# Altium PCB Main.PcbDoc
Units mil, origin at the board's own origin, x right, y up, seen from the top; angles counter-clockwise.
Board outline 1346 x 884 mil, 4 copper layers (Top Layer, Layer 1, Layer 2, Bottom Layer), stack 23.756 mil thick; 104 components, 70 nets, 324 pads, 137 vias.
Unrouted connection lines stored in the file: 54.
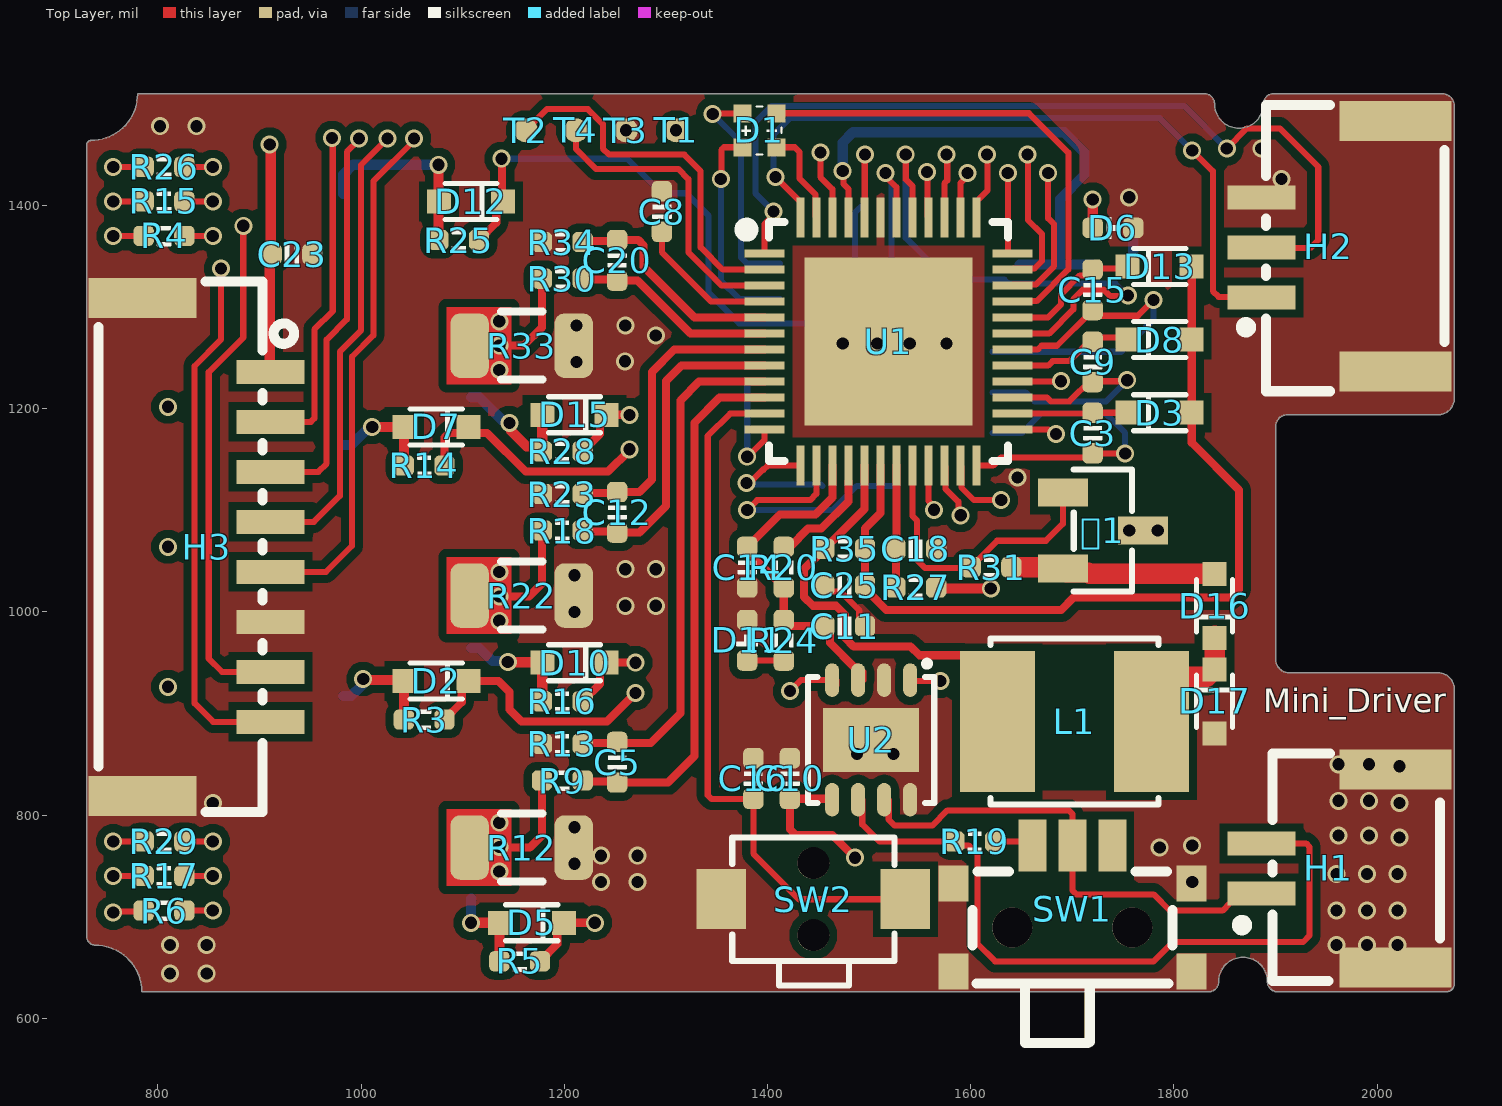
[diagram p0: Top Layer view]
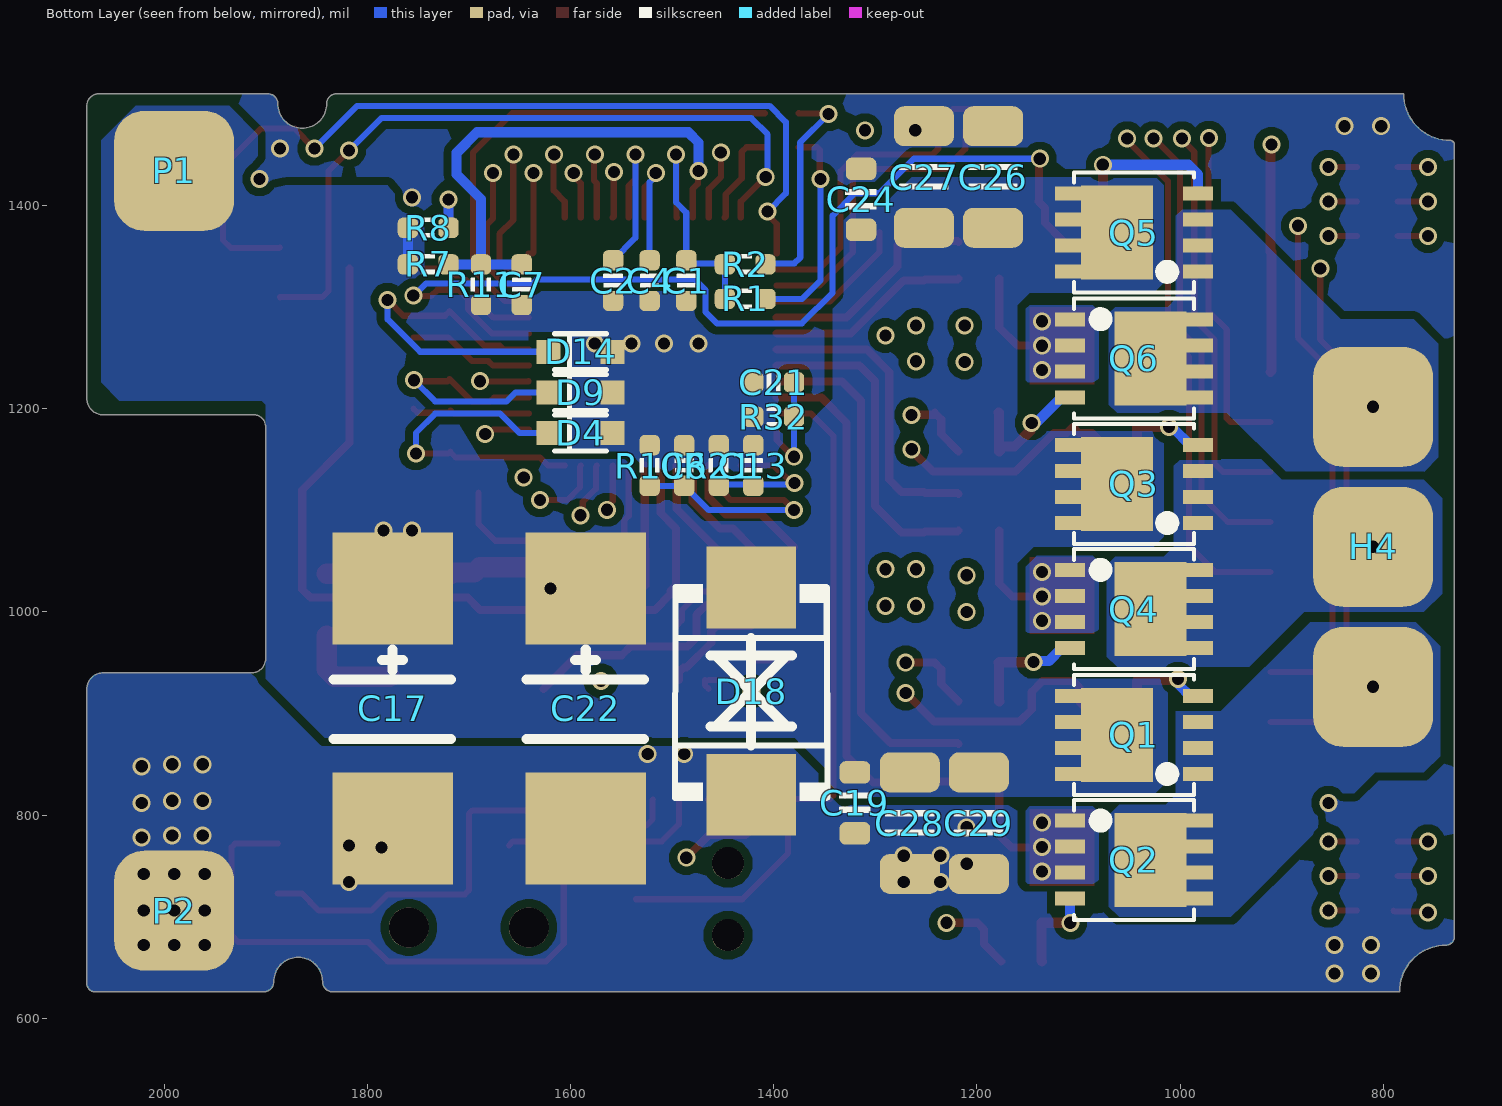
[diagram p1: Bottom Layer view, seen from below]
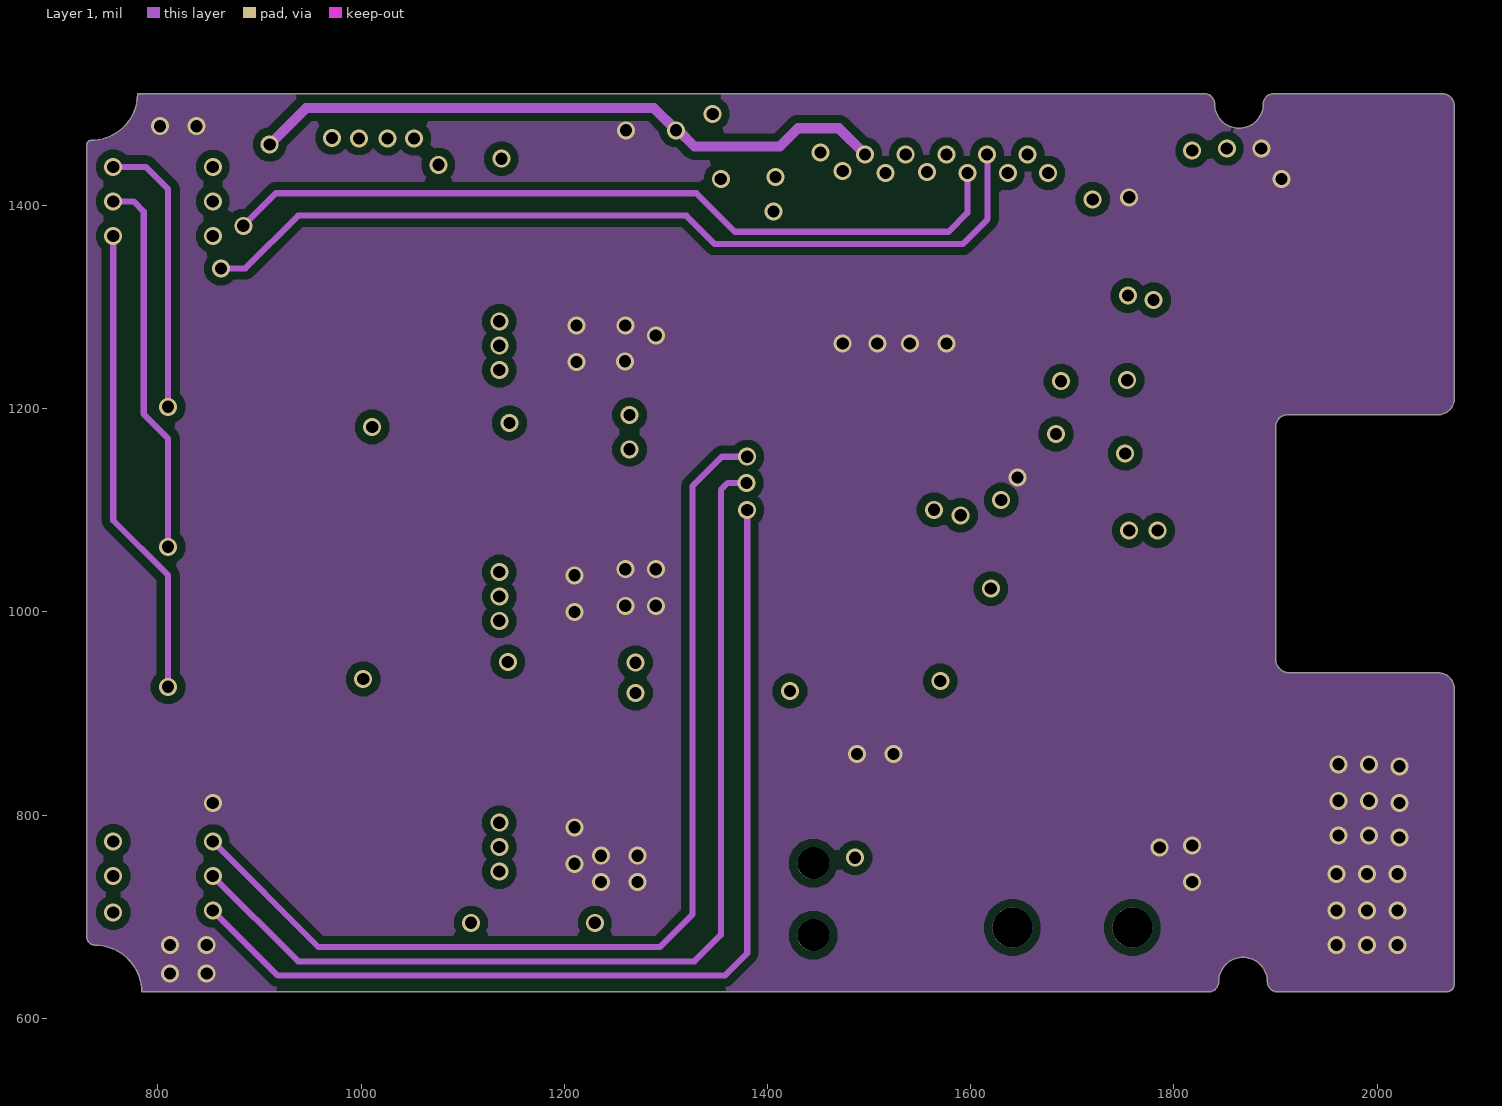
[diagram p2: Layer 1]
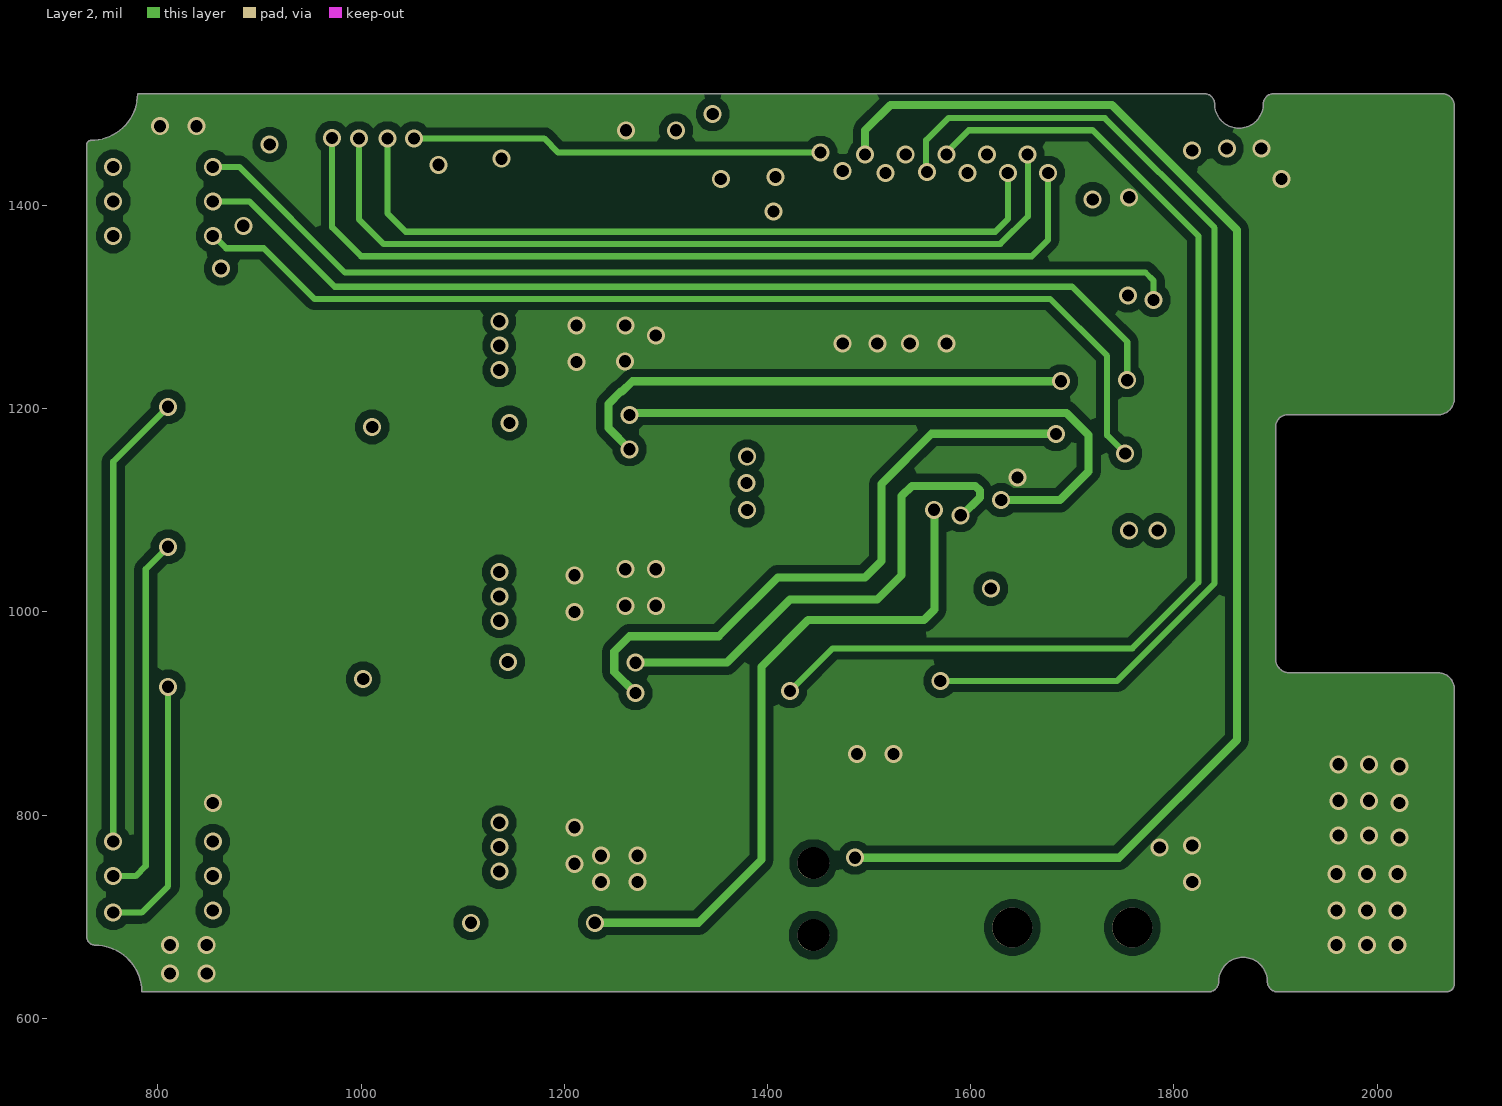
[diagram p3: Layer 2]
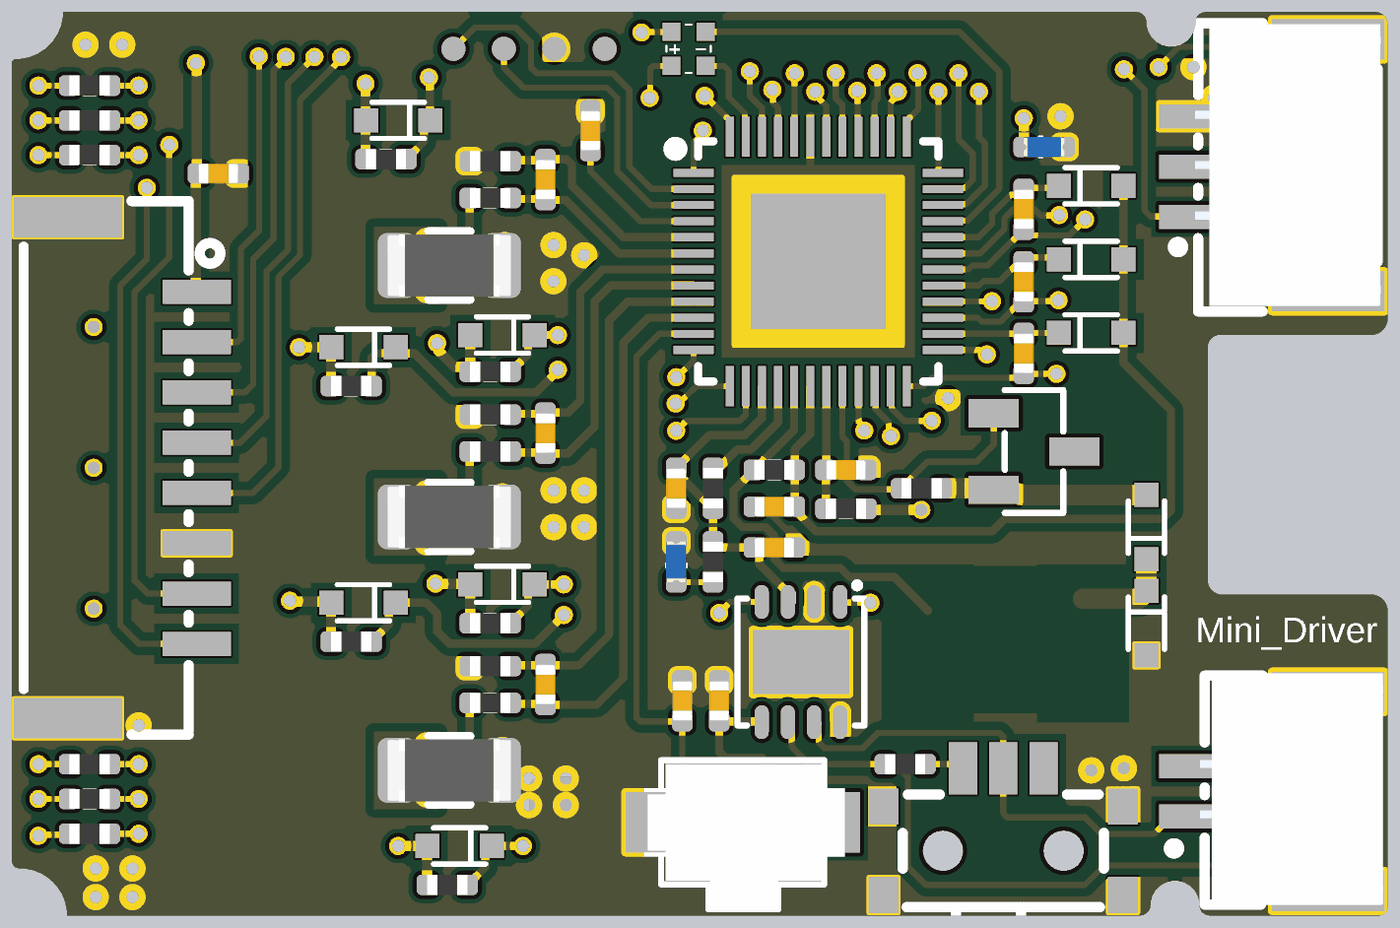
[diagram p4: 3D render of the assembled board from above, using the file's embedded part models]
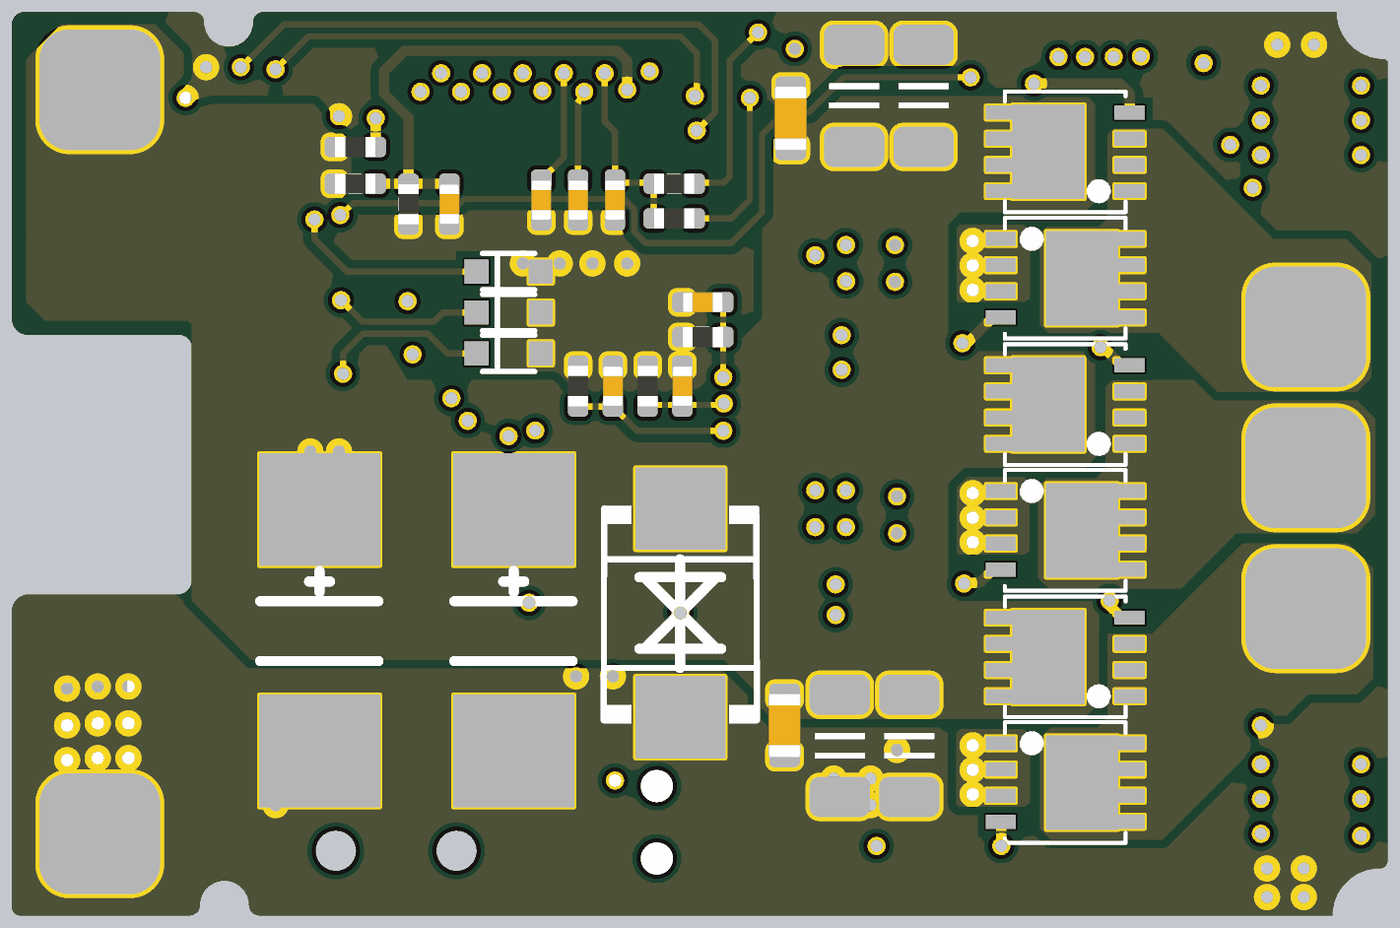
[diagram p5: 3D render of the assembled board from below, using the file's embedded part models]

## Layer stack, top to bottom
Top Solder: solder mask 0.4, Solder Resist, Dk 3.5
Top Layer: signal copper 1.4
Dielectric 2: prepreg 2.8, PP-006, Dk 4.1
Layer 1: signal copper 1.378
Dielectric 1: dielectric 12.6, FR-4, Dk 4.8
Layer 2: signal copper 1.378
Dielectric 3: prepreg 2.8, PP-006, Dk 4.1
Bottom Layer: signal copper 1.4
Bottom Solder: solder mask 0.4, Solder Resist, Dk 3.5

## Board outline
738,672 cw(c738,626) 784,626 1834,626 ccw(c1834,636) 1844,636 cw(c1868,636) 1868,660 cw(c1868,636) 1892,636 ccw(c1902,636) 1902,626 2068,626 ccw(c2068,634) 2076,634 2076,924 ccw(c2060,924) 2060,940 1914,940 cw(c1914,954) 1900,954 1900,1182 cw(c1912,1182) 1912,1194 2060,1194 ccw(c2060,1210) 2076,1210 2076,1498 ccw(c2064,1498) 2064,1510 1898,1510 ccw(c1898,1500) 1888,1500 cw(c1864,1500) 1864,1476 cw(c1864,1500) 1840,1500 ccw(c1830,1500) 1830,1510 780,1510 cw(c734,1510) 734,1464 ccw(c734,1460) 730,1460 730,680 ccw(c738,680)

## Design rules (kind name [scope] priority, off if disabled: settings)
Clearance [All] p1: gap=8 ignorepadtopadclearanceinfootprint=FALSE except(0: Arc-Hole Track-Hole SMDPad-Hole THPad-Hole Via-Hole Fill-Hole Poly-Hole Region-Hole Text-Hole; 6: Arc-Arc Arc-Track Arc-SMDPad Track-Track Track-SMDPad SMDPad-SMDPad)
ComponentClearance [All] p1: gap=0 collisioncheckmode=3 verticalgap=0 showdistances=FALSE
HoleSize [All] p1: absolutevalues=TRUE maxlimit=99999 minlimit=1 maxpercent=80.000 minpercent=20.000
MinimumSolderMaskSliver [All] p1: minsoldermaskwidth=0
PolygonConnect [All] p1: connectstyle=Direct reliefconductorwidth=10 reliefentries=4 polygonreliefangle="90 Angle" airgapwidth=10
RoutingVias [All] p1: holewidth=12 width=17.72 viastyle="Through Hole" minholewidth=6 minwidth=10 maxholewidth=15 maxwidth=28
SilkToSilkClearance [All] p1: silktosilkclearance=0
SilkToSolderMaskClearance [IsPad] p1: minsilkscreentomaskgap=0 clearancetoexposedcopper=TRUE
SolderMaskExpansion [All] p1: expansion=4 istentingtop=FALSE
Width [All] p1: maxlimit=40 minlimit=6 preferedwidth=15 minimp=50.000000 maximp=50.000000 favimp=50.000000
25 further rules are at their usual default settings.

## Components (designator, comment, footprint, x,y, rotation, side; value= is the part's Value field where it differs from the comment)
1 "CJ2310" SOT-23-3_L2.9-W1.3-P1.90-LS2.4-BR 1730,1080 r180 top (schematic designator 1)
C1 "4.7uF" CAP_0402 1486,1326 r270 bottom value=0.1u
C2 "2.2uF" CAP_0402 1558,1326 r270 bottom value=0.1u
C3 "1uF" CAP_0402 1720,1176 r90 top value=0.1u
C4 "2.2uF" CAP_0402 1522,1326 r270 bottom value=0.1u
C5 "3.3nF" CAP_0402 1252,852 r270 top value=0.1u
C6 "100nF" CAP_0402 1488,1144 r270 bottom value=0.1u
C7 "10nF" CAP_0402 1648,1322 r270 bottom value=0.1u
C8 "2.2uF" CAP_0402 1296,1394 r270 top value=0.1u
C9 "1uF" CAP_0402 1720,1246 r90 top value=0.1u
C10 "100nF" CAP_0402 1422,836 r90 top value=0.1u
C11 "100nF" CAP_0402 1476,986 r180 top value=0.1u
C12 "3.3nF" CAP_0402 1252,1098 r270 top value=0.1u
C13 "100nF" CAP_0402 1420,1144 r270 bottom value=0.1u
C14 "4.7uF" CAP_0402 1380,1044 r90 top value=0.1u
C15 "1uF" CAP_0402 1720,1317 r90 top value=0.1u
C16 "100nF" CAP_0402 1386,836 r90 top value=0.1u
C17 "10uF" CAP_7343 1775,905 r90 bottom
C18 "1uF" CAP_0402 1546,1062 r180 top value=0.1u
C19 "1uF" 0603-CAP 1320,812 r90 bottom value=0.1u
C20 "3.3nF" CAP_0402 1252,1346 r270 top value=0.1u
C21 "100nF" CAP_0402 1400,1226 r180 bottom value=0.1u
C22 "10uF" CAP_7343 1585,905 r90 bottom
C23 "100nF" CAP_0402 932,1352 r180 top value=0.1u
C24 "1uF" 0603-CAP 1314,1406 r270 bottom value=0.1u
C25 "10uF" CAP_0402 1476,1026 r0 top value=0.1u
C26 "电容-1206" 1206-CAP 1184,1428 r90 bottom value=0.1u
C27 "电容-1206" 1206-CAP 1252,1428 r90 bottom value=0.1u
C28 "电容-1206" 1206-CAP 1266,792 r270 bottom value=0.1u
C29 "电容-1206" 1206-CAP 1198,792 r270 bottom value=0.1u
D1 "LED_0404" LED-SMD_4P-L1.0-W1.0-TL-1 1392,1474 r180 top
D2 "1N5819W" SOD-523_L1.2-W0.8-LS1.6-FD 1074,932 r0 top
D3 "1N5819W" SOD-523_L1.2-W0.8-LS1.6-FD 1786,1196 r180 top
D4 "1N5819W" SOD-523_L1.2-W0.8-LS1.6-FD 1590,1176 r0 bottom
D5 "1N5819W" SOD-523_L1.2-W0.8-LS1.6-FD 1168,694 r0 top
D6 "LED_0402" LED_0402 1740,1378 r0 top value=color?
D7 "1N5819W" SOD-523_L1.2-W0.8-LS1.6-FD 1074,1182 r0 top
D8 "1N5819W" SOD-523_L1.2-W0.8-LS1.6-FD 1786,1268 r180 top
D9 "1N5819W" SOD-523_L1.2-W0.8-LS1.6-FD 1590,1216 r0 bottom
D10 "1N5819W" SOD-523_L1.2-W0.8-LS1.6-FD 1210,950 r0 top
D11 "LED_0402" LED_0402 1380,972 r90 top value=color?
D12 "1N5819W" SOD-523_L1.2-W0.8-LS1.6-FD 1108,1404 r0 top
D13 "1N5819W" SOD-523_L1.2-W0.8-LS1.6-FD 1786,1340 r180 top
D14 "1N5819W" SOD-523_L1.2-W0.8-LS1.6-FD 1590,1256 r0 bottom
D15 "1N5819W" SOD-523_L1.2-W0.8-LS1.6-FD 1210,1194 r0 top
D16 "1N5819W" SOD-523_L1.2-W0.8-LS1.6-FD 1840,1006 r270 top
D17 "1N5819W" SOD-523_L1.2-W0.8-LS1.6-FD 1840,912 r90 top
D18 "TVS-SMB" SMB_L4.3-W3.6-LS5.4-BI 1422,922 r270 bottom
H1 "GH1.25-2PW" CONN-TH_2P-P1.25_XUNPU_WAFER-GH1.25-2PLB 1952,747.44 r90 top
H2 "GH1.25-3PW" CONN-SMD_GH1.25-3P 1952,1360 r90 top
H3 "GH1.25-8PWBPZ" CONN-SMD_8P-P1.25_GH1.25-8PWBPZ 838,1064 r270 top
H4 "MR30_SMD" MR30_SMD 810,1064 r90 bottom
L1 "100uH" IND-SMD_L4.0-W4.0_SMNR4020 -14225.88,18784 r0 top
P1 "PAD" Pad 1990,1434 r180 bottom
P2 "PAD" Pad 1990,706 r180 bottom
Q1 "WSD6036DN" DFN3X3-8L__L3.0-W3.0-P0.65-LS3.2-BL 1034.6,878.95 r0 bottom
Q2 "WSD6036DN" DFN3X3-8L__L3.0-W3.0-P0.65-LS3.2-BL 1056.25,756.05 r180 bottom
Q3 "WSD6036DN" DFN3X3-8L__L3.0-W3.0-P0.65-LS3.2-BL 1034.6,1125.95 r0 bottom
Q4 "WSD6036DN" DFN3X3-8L__L3.0-W3.0-P0.65-LS3.2-BL 1056.25,1002.8 r180 bottom
Q5 "WSD6036DN" DFN3X3-8L__L3.0-W3.0-P0.65-LS3.2-BL 1034.6,1373.2 r0 bottom
Q6 "WSD6036DN" DFN3X3-8L__L3.0-W3.0-P0.65-LS3.2-BL 1056.25,1249.6 r180 bottom
R1 "1K" RES_0402 1428,1308 r180 bottom value=22R
R2 "1K" RES_0402 1428,1342 r180 bottom value=22R
R3 "10R" RES_0402 1062,894 r0 top value=22R
R4 "10R" RES_0402 806,1370 r0 top value=22R
R5 "10R" RES_0402 1156,656 r0 top value=22R
R6 "100K" RES_0402 806,706 r0 top value=22R
R7 "100K" RES_0402 1740,1342 r180 bottom value=22R
R8 "10K" RES_0402 1740,1378 r180 bottom value=22R
R9 "100R" RES_0402 1198,834 r0 top value=22R
R10 "4.3K" RES_0402 1522,1144 r90 bottom value=22R
R11 "4.3K" RES_0402 1688,1322 r270 bottom value=22R
R12 "2mR" 1206-RES 1158,768 r180 top value=22R
R13 "100R" RES_0402 1198,870 r0 top value=22R
R14 "10R" RES_0402 1062,1144 r0 top value=22R
R15 "10R" RES_0402 806,1404 r0 top value=22R
R16 "10R" RES_0402 1198,912 r0 top value=22R
R17 "100K" RES_0402 806,740 r0 top value=22R
R18 "100R" RES_0402 1198,1080 r0 top value=22R
R19 "120R" RES_0402 1604,774 r180 top value=22R
R20 "33R" RES_0402 1416,1044 r270 top value=22R
R21 "4.3K" RES_0402 1454,1144 r90 bottom value=22R
R22 "2mR" 1206-RES 1158,1016 r180 top value=22R
R23 "100R" RES_0402 1198,1116 r0 top value=22R
R24 "2K" RES_0402 1416,972 r270 top value=22R
R25 "10R" RES_0402 1096,1366 r0 top value=22R
R26 "10R" RES_0402 806,1438 r0 top value=22R
R27 "0R" RES_0402 1546,1024 r0 top value=22R
R28 "10R" RES_0402 1198,1158 r0 top value=22R
R29 "100K" RES_0402 806,774 r0 top value=22R
R30 "100R" RES_0402 1198,1328 r0 top value=22R
R31 "100R" RES_0402 1620,1044 r180 top value=22R
R32 "4.3K" RES_0402 1400,1192 r0 bottom value=22R
R33 "2mR" 1206-RES 1158,1262 r180 top value=22R
R34 "100R" RES_0402 1198,1364 r0 top value=22R
R35 "0.33R" RES_0402 1476,1062 r180 top value=22R
SW1 "TA-3514-A1-B" TA-3514-A1-B 1700,683.15 r0 top
SW2 "YD-3410" SW-SMD_L3.9-W2.9-LS4.8-EH-A 1445,705 r0 top
T1 "testpoint" testpoint 1310,1474 r0 top
T2 "testpoint" testpoint 1162,1474 r0 top
T3 "testpoint" testpoint 1260.67,1474 r0 top
T4 "testpoint" testpoint 1211.33,1474 r0 top
U1 "PAC5523AQM-T" QFN-48_L6.0-W6.0-P0.40-TL-EP4.2 1517,1266 r0 top
U2 "SIT1044TK/3" TDFN-8_L3.0-W3.0-P0.65-BL-EP 1502,874 r180 top

## Footprints (in the part's own frame and the unit in brackets; to place one, negate y for a bottom-side part, rotate by r counter-clockwise, add the part's x,y. Pads: shape width x height; smd on the part's side, far side on the other; paste and mask are expansions set on the pad)
0603-CAP [mil]
  rrect50% 22x30 smd: 1(-30,0) 2(30,0)
  silkscreen extent -10,-15 10,15, body extent -31,-16 31,16, height 31
1206-CAP [mm]
  rrect50% 1x1.5 smd: 1(-1.27,0) 2(1.27,0)
  silkscreen extent -0.3,-0.61 0.3,0.61, body extent -1.5,-0.75 1.5,0.75, height 1.5
1206-RES [mil]
  rrect50% 37.64x63.38 smd paste+0 mask+0: 1(-51.22,0) 2(51.22,0)
  silkscreen extent -21,-33 21,33, body extent -61,-31 61,31, height 26
CAP_0402 [mil]
  rrect50% 20x20 smd: 1(-20,0) 2(20,0)
  silkscreen extent -7,-9 7,9, body extent -20,-10 20,10, height 20
CAP_7343 [mil]
  rect 110.2x118.5 smd paste+0 mask+2: 1(118.11,0) 2(-118.11,0)
  silkscreen extent -30,-58 58,58
CONN-SMD_8P-P1.25_GH1.25-8PWBPZ [mm]
  rect 0.6x1.7 smd paste+0 mask+0.05: 1(-4.375,1.85) 2(-3.125,1.85) 3(-1.875,1.85) 4(-0.625,1.85) 5(0.625,1.85) 6(1.875,1.85) 7(3.125,1.85) 8(4.375,1.85)
  rect 1x2.7 smd paste+0 mask+0.05: 9(-6.225,-1.35) 10(6.225,-1.35)
  silkscreen extent -6.63,-2.45 6.63,2.44
CONN-SMD_GH1.25-3P [mm]
  rect 0.6x1.7 smd: 1(-1.282,1.675) 2(-0.032,1.675) 3(1.218,1.675)
  rect 1x2.8 smd: 4(-3.132,-1.675) 5(3.132,-1.675)
  silkscreen extent -3.63,-2.9 3.53,2.19, body extent -3.49,-2.98 3.51,1.63, height 4.03
CONN-TH_2P-P1.25_XUNPU_WAFER-GH1.25-2PLB [mm]
  rect 0.6x1.7 smd: 1(-0.625,1.675) 2(0.625,1.675)
  rect 1x2.8 smd: 3(2.475,-1.675) 4(-2.475,-1.675)
  silkscreen extent -2.81,-2.79 2.87,2.29, body extent -2.83,-3.04 2.93,1.51, height 4.03
DFN3X3-8L__L3.0-W3.0-P0.65-LS3.2-BL [mm]
  rect 0.75x0.35 smd paste+0 mask+0.05: 1(-1.325,-0.325) 1(-1.325,0.325) 1(-1.325,0.975) 2(-1.325,-0.975) 3(1.875,-0.975) 3(1.875,-0.325) 3(1.875,0.325) 3(1.875,0.975)
  rect 1.8x2.35 smd paste+0 mask+0.05: 3(0.696,-0.001)
  silkscreen extent -1.23,-1.5 1.77,1.5
IND-SMD_L4.0-W4.0_SMNR4020 [mil]
  rect 73.78x138.58 smd paste+0 mask+2: 1(16003.88,-17892) 2(15852.07,-17892)
  silkscreen extent 15845,-17974 16011,-17810
LED-SMD_4P-L1.0-W1.0-TL-1 [mm]
  rect 0.45x0.45 smd paste+0 mask+0.05: 1(-0.426,0.425) 2(0.424,0.425) 3(-0.426,-0.425) 4(0.424,-0.425)
  silkscreen extent -0.55,-0.6 0.55,0.6
LED_0402 [mil]
  rrect50% 20x20 smd: 1(-20,0) 2(20,0)
  silkscreen extent -6,-10 6,10, body extent -20,-10 20,10, height 18
MR30_SMD [mm]
  rrect50% 3x3 smd: 1(-3.5,0) 2(0,0) 3(3.5,0)
Pad [mm]
  rrect50% 3x3 smd: 1(0,0)
QFN-48_L6.0-W6.0-P0.40-TL-EP4.2 [mm]
  rect 1x0.2 smd paste-100 mask+0.05: 1(-3.05,2.2) 2(-3.05,1.8) 3(-3.05,1.4) 4(-3.05,1) 5(-3.05,0.6) 6(-3.05,0.2) 7(-3.05,-0.2) 8(-3.05,-0.6) 9(-3.05,-1) 10(-3.05,-1.4) 11(-3.05,-1.8) 12(-3.05,-2.2) 25(3.15,-2.2) 26(3.15,-1.8) 27(3.15,-1.4) 28(3.15,-1) 29(3.15,-0.6) 30(3.15,-0.2) 31(3.15,0.2) 32(3.15,0.6) 33(3.15,1) 34(3.15,1.4) 35(3.15,1.8) 36(3.15,2.2)
  rect 0.2x1 smd paste-100 mask+0.05: 13(-2.15,-3.1) 14(-1.75,-3.1) 15(-1.35,-3.1) 16(-0.95,-3.1) 17(-0.55,-3.1) 18(-0.15,-3.1) 19(0.25,-3.1) 20(0.65,-3.1) 21(1.05,-3.1) 22(1.45,-3.1) 23(1.85,-3.1) 24(2.25,-3.1) 37(2.25,3.1) 38(1.85,3.1) 39(1.45,3.1) 40(1.05,3.1) 41(0.65,3.1) 42(0.25,3.1) 43(-0.15,3.1) 44(-0.55,3.1) 45(-0.95,3.1) 46(-1.35,3.1) 47(-1.75,3.1) 48(-2.15,3.1)
  rect 4.2x4.2 smd paste-100 mask+0.05: 49(0.05,0)
  silkscreen extent -3.65,-2.98 3.03,2.98
RES_0402 [mil]
  rrect50% 20x20 smd: 1(-20,0) 2(20,0)
  silkscreen extent -7,-10 7,10, body extent -20,-10 20,10, height 14
SMB_L4.3-W3.6-LS5.4-BI [mil]
  rect 80.61x88.23 smd paste+0 mask+2: 1(-102.02,0) 2(102.02,0)
  silkscreen extent -105,-75 108,75
SOD-523_L1.2-W0.8-LS1.6-FD [mm]
  rect 0.6x0.6 smd paste+0 mask+0.051: 1(0.8,0) 2(-0.8,0)
  silkscreen extent -0.65,-0.45 0.65,0.45
SOT-23-3_L2.9-W1.3-P1.90-LS2.4-BR [mm]
  rect 1.25x0.7 smd: 1(1,-0.95) 2(1,0.95) 3(-1,0)
  silkscreen extent -0.73,-1.53 0.73,1.53
SW-SMD_L3.9-W2.9-LS4.8-EH-A [mm]
  rect 1.23x1.5 smd: 1(-2.3,0.309) 2(2.3,0.309)
  round 0.8 hole 0.8 unplated: ""(0,-0.591) ""(0,1.209)
  silkscreen extent -2.03,-1.85 2.03,1.85, body extent -2.46,-1.8 2.54,1.75, height 1.5
TA-3514-A1-B [mm]
  rect 0.7x1.3 smd paste+0 mask+0.051: 1(-1,2.206) 2(0,2.206) 3(1,2.206)
  rect 0.75x0.9 smd paste+0 mask+0.051: 4(-2.975,-0.944) 4(-2.975,1.256) 4(2.975,-0.944) 4(2.975,1.256)
  round 1 hole 1 unplated paste+0: ""(-1.5,0.156) ""(1.5,0.156)
  silkscreen extent -2.5,-2.73 2.5,1.56
TDFN-8_L3.0-W3.0-P0.65-BL-EP [mm]
  oval 0.35x0.84 smd: 1(-0.975,-1.495) 2(-0.325,-1.495) 3(0.325,-1.495) 4(0.975,-1.495) 5(0.975,1.495) 6(0.325,1.495) 7(-0.325,1.495) 8(-0.975,1.495)
  rect 2.4x1.6 smd: 9(0,0)
  silkscreen extent -1.58,-1.98 1.58,1.58, body extent -1.58,-1.58 1.58,1.58, height 0.76
testpoint [mm]
  round 0.6 smd: 1(0,0)

## Part data
1: library part YJL3400A, "NMOS"
C1 C2 C3 C4 C5 C6 C7 C8 C9 C10 C11 C12 C13 C14 C15 C16 C18 C20 C21 C23 C25: library part 电容-0402, "Capacitor"
C17 C22: library part 电容_7343
C19 C24: library part 电容-0603, "Capacitor"
C26 C27 C28 C29: "Capacitor"
D1: "XL-1010SURUBC"
D2 D3 D4 D5 D7 D8 D9 D10 D12 D13 D14 D15 D16 D17: "二极管"
D6 D11: "LED", Type=0402
D18: "TPSMB30CA-VR"
L1: library part 电感_4020, "SMNR4020-101MT"
Q1 Q2 Q3 Q4 Q5 Q6: "NMOS"
R1 R2 R3 R4 R5 R6 R7 R8 R9 R10 R11 R13 R14 R15 R16 R17 R18 R19 R20 R21 R23 R24 R25 R26 R27 R28 R29 R30 R31 R32 R34 R35: library part 电阻-0402, "Resistor"
R12 R22 R33: library part 电阻-1206, "Resistor"
SW1: "key"
SW2: "按键"
T1 T2 T3 T4: "测试点"
U2: "CAN"

## Via types
v1: diameter 17.72, hole 12, Top Layer to Bottom Layer, 137 vias

## Nets (pads, with @x,y where several pads share a name; then routed paths per layer and width w, separated by ;. In a path a pad name is that pad's centre, name@x,y a point inside that pad or via, vN(x,y) a via of type N, cw(c..) or ccw(c..) an arc to the next point about the centre after c; other vN are vias at no path point)
AIO0: C20.1 R34.2 U1.5 | length 223.7
  Top Layer w8: R34.2 1219,1365 1251,1365 C20.1 1272.79,1366 1278,1360.79 1278,1339.8 1328.18,1289.62 U1.5
AIO1: C20.2 R30.2 U1.6 | length 201.3
  Top Layer w8: R30.2 1219,1327 1251,1327 C20.2 1272,1326 1324.13,1273.88 U1.6
AIO2: C12.1 R23.2 U1.7 | length 299.9
  Top Layer w8: R23.2 1219,1117 1251,1117 C12.1 1274,1118 1286.18,1130.18 1286.18,1236.18 1308.13,1258.13 U1.7
AIO3: C12.2 R18.2 U1.8 | length 319.9
  Top Layer w8: R18.2 1219,1079 1251,1079 C12.2 1274,1078 1300.18,1104.18 1300.18,1227.15 1315.41,1242.38 U1.8
AIO4: C5.1 R13.2 U1.9 | length 507.1
  Top Layer w8: R13.2 1219,871 1252,871 1285,871 1314.18,900.18 1314.18,1208.18 1332.63,1226.63 U1.9
AIO5: C5.2 R9.2 U1.10 | length 528.8
  Top Layer w8: R9.2 1219,833 1251,833 C5.2 1302,832 1328.18,858.18 1328.18,1186.18 1352.82,1210.82 1396.86,1210.82 U1.10
AIO6: C16.1 SW2.2 U1.11 | length 686.9
  Top Layer w6: U1.11 1363.15,1195.15 1341.18,1173.18 1341.18,819.51 1344.69,816 C16.1 1386,762 1430.84,717.16 SW2.2
CAN_H: H1.1 SW1.2 U2.7 | length 489.4
  Top Layer w6: U2.7@1518.8,815.14 1519.29,814.65 1519.29,795.51 1525.19,789.61 1562.09,789.61 1577.08,804.59 1696.49,804.59 1700,801.08 1700,726 1704,722 1780,722 1796.12,705.88 1847.88,705.88 1855.59,713.59 1855.59,714.02 1864.4,722.83 H1.1@1888.11,722.83
CAN_L: H1.2 R19.2 U2.6 | length 716.5
  Top Layer w6: U2.6@1493.2,815.14 1493.2,790.79 1510,774 R19.2 1587.9,770.1 1597.9,770.1 1606.64,761.36 1606.64,673.36 1624,656 1780,656 1799,675 1927,675 1933.51,681.51 1933.51,768.54 1930,772.05 H1.2@1888.11,772.05
CAN_RX: U1.39 U2.4 | length 1209.3
  Top Layer w6: v1(1422,922) 1432.86,932.86 U2.4 ; U2.4@1464.02,924.11 1467.61,927.7 U2.4@1467.61,932.86 ; U1.39 1574.08,1421.77 1576.91,1424.59 1576.91,1449.29 v1(1576.06,1450.14)
  Layer 2 w6: v1(1422,922) 1464,964 1759.03,964 1824,1028.97 1824,1370 1720,1474 1598,1474 1576.06,1452.06 v1(1576.06,1450.14)
CAN_TX: U1.40 U2.1 | length 1100.4
  Top Layer w6: U2.1@1544.39,932.86 1545.24,932 v1(1570,932) ; v1@1557.04,1432.81 1557.39,1432.46 1557.39,1408.25 1557.4,1388.98 U1.40
  Layer 2 w6: v1(1557.05,1432.82) 1556.14,1433.73 1556.14,1464.14 1578,1486 1732,1486 1840,1378 1840,1028 1744,932 v1(1570,932)
CSM: L1.2 R35.2 U1.17 | length 395
  Top Layer w8: U1.17 1495.34,1101.34 R35.2 1436,1042 1436,1014.79 1444.79,1006 1467.21,1006 1476,997.21 1476,974.79 1484.79,966 1540.78,966 1549.48,957.29 1593.3,957.29 1593.38,957.21 1593.38,957 L1.2@1626.38,924
DRM: 1.1 R31.2 U1.20 | length 290.5
  Top Layer w6: U1.20 1542.59,1094.5 1547,1090.09 1547,1051.2 1555.2,1043 1599,1043 R31.2 1626,1070 1674,1070 1690.63,1086.63 1.1
DRS3: C3.1 D4.1 R4.2 U1.24 | length 1377.7
  Top Layer w6: R4.2 v1(854,1370) ; U1.24 1621.95,1143.95 1630,1152 1713.15,1152 1718,1156.85 C3.1@1718,1158 ; C3.1 v1(1752,1156)
  Layer 2 w6: v1(854,1370) 854.97,1370 867.11,1357.86 904.14,1357.86 954,1308 1678,1308 1734.14,1251.86 1734.14,1173.86 v1(1752,1156)
  Bottom Layer w6: D4.1 1650,1176 1669.15,1195.15 1733.06,1195.15 1752,1176.21 v1(1752,1156)
DRS4: C9.1 D9.1 R15.2 U1.27 | length 1292.5
  Top Layer w6: R15.2 v1(854,1404) ; U1.27 1675.12,1210.88 1678.85,1207.15 1697.15,1207.15 1718.92,1228.92 1720.84,1227 1753,1227 v1(1754,1228)
  Layer 2 w6: v1(854,1404) 890,1404 974,1320 1699.68,1320 1754,1265.68 v1(1754,1228)
  Bottom Layer w6: D9.1 1654,1216 1662.85,1207.15 1733.15,1207.15 v1(1754,1228)
DRS5: C15.1 D14.1 R26.2 U1.30 | length 1373.1
  Top Layer w6: R26.2 v1(854,1438) ; U1.30 1665.87,1258.13 1669.62,1261.88 1684.87,1261.88 1719,1296 1723.53,1291.47 1764.47,1291.47 v1(1780,1307)
  Layer 2 w6: v1(854,1438) 880,1438 984,1334 1772,1334 1780,1326 v1(1780,1307)
  Bottom Layer w6: D14.1 1748,1256 1780,1288 v1(1780,1307)
GND: C1.2 C2.2 C4.2 C6.1 C7.2 C8.1 C10.2 C11.1 C13.1 C14.1 C16.2 C17.2 C18.1 C19.1 C21.1 C22.2 C23.1 C24.1 C25.1 C26.2 C27.2 C28.2 C29.2 D4.2 D6.2 D9.2 D11.2 D14.2 D17.2 D18.2 H1.3 H1.4 H2.3 H2.4 H2.5 H3.6 H3.9 H3.10 P2.1 R10.2 R11.2 R12.1 R13.1 R21.2 R22.1 R23.1 R32.2 R33.1 R34.1 SW1.4 SW2.1 T3.1 U1.43 U1.49 U2.2 U2.8 U2.9 | length 62.2
  Top Layer w6: C25.1 1461.77,1020.23 1471.36,1020.23 1490.23,1001.36 1490.23,991.77 C11.1
  other v1: 812,644 848,644 812,672 848,672 1960,672 1990,672 2020,672 1960,706 1990,706 2020,706 1236,734 1272,734 1818,734 1960,742 1990,742 2020,742 1210,752 1236,760 1272,760 1786,768 1818,770 2022,778 1962,780 1992,780 1210,788 854,812 2022,812 1962,814 1992,814 2022,848 1962,850 1992,850 1488,860 1524,860 1210,1000 1260,1006 1290,1006 1210,1036 1260,1042 1290,1042 1646,1132.14 1212,1246 1259.79,1246.58 1474,1264 1508,1264 1540,1264 1576,1264 1290,1272 1212,1282 1260,1282 1756,1408 1906,1426 1886,1456 1260.67,1474 802,1478 838,1478
HALL_U: H3.2 U1.34 | length 1348.6
  Top Layer w6: H3.2 950.49,1187.03 954,1190.55 954,1278.06 972,1296.06 972,1466 v1(971.46,1466.54) ; U1.34 1641.95,1322.06 1664.06,1322.06 1682,1340 1682,1381.51 1676.2,1387.32 v1(1676.2,1432)
  Layer 2 w6: v1(971.46,1466.54) 971.46,1378.54 1000,1350 1660,1350 1676.2,1366.2 v1(1676.2,1432)
HALL_V: H3.3 U1.35 | length 1355.5
  Top Layer w6: H3.3 957.82,1137.82 966,1146 966,1268 986,1288 986,1452.74 997.96,1464.7 v1(997.96,1466.04) ; U1.35 1641.95,1337.79 1662.54,1337.79 1670,1345.25 1670,1372 1656.34,1385.66 1656.34,1449.8 v1(1656,1450.14)
  Layer 2 w6: v1(997.96,1466.04) 997.96,1386.04 1021.86,1362.14 1629.11,1362.14 1656.34,1389.37 1656.34,1449.8 v1(1656,1450.14)
HALL_W: H3.4 U1.36 | length 1275.8
  Top Layer w6: H3.4 953.3,1088.61 979,1114.31 979,1256.17 1000,1277.17 1000,1440 v1(1026,1466) ; v1(1636.48,1432) 1636.48,1353.55 1637.42,1352.62 U1.36
  Layer 2 w6: v1(1026,1466) 1026,1392 1043.86,1374.14 1624.14,1374.14 1636.48,1386.48 v1(1636.48,1432)
I2C_SCL: H3.8 U1.37 | length 1449.8
  Top Layer w6: v1(862,1338) 862,1268 836,1242 836,910 854.24,891.76 H3.8 ; U1.37 1605.58,1403.8 1616.63,1414.84 1616.63,1449.52 v1(1616,1450.14)
  Layer 1 w6: v1(862,1338) 886,1338 938,1390 1320,1390 1348,1362 1592,1362 1616.63,1386.63 1616.63,1449.52 v1(1616,1450.14)
I2C_SDA: H3.7 U1.38 | length 1341.8
  Top Layer w6: v1(884,1380) 884,1270 850,1236 850,954 863.03,940.97 H3.7 ; U1.38 1589.83,1421.9 1596.77,1428.83 v1(1596.77,1432)
  Layer 1 w6: v1(884,1380) 916,1412 1330,1412 1367.86,1374.14 1578.14,1374.14 1596.77,1392.77 v1(1596.77,1432)
Net1_2: 1.2 D16.2 R31.1 | length 202.7
  Top Layer w20: R31.1 1689.23,1044 1694.41,1038.82 1715.63,1038.82 1716.95,1037.5 D16.2
NetC4_1: C4.1 U1.42 | length 136.9
  Top Layer w6: v1(1516,1432) 1516,1428.83 1526.84,1417.99 U1.42
  Bottom Layer w6: v1(1516,1432) 1516,1428.83 1522,1422.83 C4.1
NetD1_2: D1.2 R1.2 | length 216.1
  Top Layer w6: v1(1354,1426) 1354.65,1426.65 1354.65,1454.62 1357.29,1457.27 D1.2
  Bottom Layer w6: v1(1354,1426) 1354,1326 1372,1308 R1.2@1412,1308
NetD1_4: D1.4 R2.2 | length 223
  Top Layer w6: v1(1346,1490) 1346.37,1490.37 1374.93,1490.37 D1.4
  Bottom Layer w6: v1(1346,1490) 1373.86,1462.14 1373.86,1348.66 1379.51,1343 R2.2@1412,1343
NetD2_2: D2.2 Q1.2 R3.1 | length 108.9
  Top Layer w10: v1(1002,934) 1003,933 1041.5,933 D2.2 1042.25,931.75 1042.25,894.25 R3.1
  Bottom Layer w10: Q1.2 990.32,917.35 1000.52,927.55 1000.52,932.52 v1(1002,934)
NetD5_2: D5.2 Q2.2 R5.1 | length 90.5
  Top Layer w10: v1(1108,694) D5.2 1136.25,693.75 1136.25,656.25 R5.1
  Bottom Layer w10: v1(1108,694) 1108.2,694.2 1108.2,717.45 Q2.2
NetD6_1: D6.1 R8.2 | length 56
  Top Layer w10: D6.1 v1(1720,1406)
  Bottom Layer w10: R8.2 v1(1720,1406)
NetD7_2: D7.2 Q3.2 R14.1 | length 105.6
  Top Layer w10: v1(1010.86,1182) D7.2 1042.25,1181.75 1042.25,1144.25 R14.1
  Bottom Layer w10: Q3.2 990.32,1164.35 1006.5,1180.52 1009.38,1180.52 v1(1010.86,1182)
NetD10_2: D10.2 Q4.2 R16.1 | length 114.3
  Top Layer w10: v1(1144.38,950.78) 1144.77,950.39 1178.11,950.39 D10.2 1178.25,949.75 1178.25,912.25 R16.1
  Bottom Layer w10: Q4.2 1116.27,964.4 1129.2,951.48 1143.69,951.48 v1(1144.38,950.78)
NetD11_1: D11.1 R24.2 | length 36
  Top Layer w6: D11.1@1386,952 R24.2@1422,952
NetD12_2: D12.2 Q5.2 R25.1 | length 190.5
  Top Layer w10: R25.1 v1(1076,1440)
  Bottom Layer w10: Q5.2 982.45,1413.27 982.23,1413.49 982.23,1430.23 992,1440 v1(1076,1440)
NetD15_2: D15.2 Q6.2 R28.1 | length 133.5
  Top Layer w10: v1(1146,1186) 1147.48,1184.52 1147.48,1178.32 1163,1162.8 1173.2,1162.8 R28.1 1178.25,1158.25 1178.25,1195.75 D15.2@1178.5,1196
  Bottom Layer w10: Q6.2 1116.27,1211.2 1140,1187.48 1144.52,1187.48 v1(1146,1186)
NetD16_1: D16.1 D17.1 L1.1 | length 98.1
  Top Layer w20: L1.1@1778,936 1832.5,936 D17.1 D16.1@1840,976.5
NetQ2_1: Q2.1 R9.1 R12.2 | length 101.2
  Top Layer w8: v1(1136,768.45) 1136.45,768 1166,768 1178,780 R9.1
  other v1: 1136,744.45 1136,792.45
NetQ4_1: Q4.1 R18.1 R22.2 | length 99.3
  Top Layer w8: v1(1136,1015.2) 1165.2,1015.2 1178,1028 R18.1
  other v1: 1136,991.2 1136,1039.2
NetQ6_1: Q6.1 R30.1 R33.2 | length 97.5
  Top Layer w8: v1(1136,1262) 1160,1262 1178,1280 R30.1
  other v1: 1136,1238 1136,1286
NetR19_1: R19.1 SW1.1 | length 38.3
  Top Layer w6: R19.1 1656.63,774 SW1.1
NetR20_1: R20.1 U1.16 | length 95.7
  Top Layer w8: R20.1@1422,1064 1439.88,1081.88 1444.67,1081.88 1444.79,1082 1452.9,1082 1479.59,1108.69 U1.16@1479.59,1128.27
PC7: D1.3 U1.33 | length 486.4
  Top Layer w6: D1.3 1657.27,1490.73 1696.06,1451.94 1696.06,1337.09 1664.85,1305.88 1641.53,1305.88 U1.33
PF4: D1.1 U1.47 | length 96
  Top Layer w6: D1.1 1426.73,1457.27 1431.36,1452.64 1431.36,1426.64 1447.16,1410.84 1447.16,1388.98 U1.47
PF6: C7.1 R7.2 R11.1 U1.45 | length 518.6
  Top Layer w6: v1(1474,1434) 1474.63,1433.37 1474.63,1421.37 1479.6,1416.4 U1.45
  Bottom Layer w10: v1(1474,1434) 1474,1462 1484,1472 1692,1472 1712,1452 1712,1430.42 1688,1406.42 R11.1 ; C7.1 R11.1 ; R7.2 R11.1
SWCLK: T4.1 U1.3 | length 301.9
  Top Layer w6: T4.1 1211.33,1455.65 1230.98,1436 1312.14,1436 1322.14,1426 1322.14,1353.86 1354.88,1321.12 U1.3
SWDIO: T2.1 U1.2 | length 367
  Top Layer w6: T2.1 1182.81,1494.81 1223.19,1494.81 1238,1480 1238,1456 1244,1450 1318,1450 1334.14,1433.86 1334.14,1358.83 1356.12,1336.85 U1.2
TEMP: H3.5 U1.46 | length 991.7
  Top Layer w6: H3.5 965.39,1039.39 991,1065 991,1251.2 1012,1272.2 1012,1423.92 1052,1463.92 v1(1052,1466) ; v1(1452,1452) 1452,1427.92 1463.85,1416.07 U1.46
  Layer 2 w6: v1(1052,1466) 1180,1466 1194,1452 v1(1452,1452)
U_OUT: H4.1 Q1.1 Q2.3 R4.1 R6.1 | length 792
  Top Layer w6: v1(756,704) 757,705 789,705 R6.1@790,706 ; v1(756,1370) R4.1
  Layer 1 w6: v1(756,1370) 756,1089.92 810,1035.92 v1(810,926.2)
  Layer 2 w6: v1(756,704) 784,704 810,730 v1(810,926.2)
UART_RX: H2.1 U1.48 | length 722
  Top Layer w6: v1(1407.86,1427.96) 1408.19,1427.96 1432.35,1403.8 U1.48 ; v1(1818,1454) 1838.31,1433.69 1838.31,1315.69 1844,1310 1885.59,1310 H2.1
  Bottom Layer w6: v1(1407.86,1427.96) 1405.96,1429.86 1405.96,1469.96 1422,1486 1786,1486 v1(1818,1454)
UART_TX: H2.2 U1.1 | length 874.1
  Top Layer w6: U1.1 1396.92,1381.75 1406,1390.83 v1(1406,1394) ; v1(1852,1456) 1871.86,1475.86 1904.14,1475.86 1942,1438 1942,1366 1934,1358 1886.8,1358 H2.2
  Bottom Layer w6: v1(1406,1394) 1388,1412 1388,1482 1404,1498 1810,1498 v1(1852,1456)
UB: C3.2 D3.1 U1.26 | length 114.3
  Top Layer w6: U1.26 1715.15,1195.15 C3.2@1718,1198 ; C3.2 1750.5,1196 D3.1@1754.5,1200
UH: D2.1 R3.2 U1.25 | length 913.2
  Top Layer w6: U1.25 1676.33,1179.39 1680.75,1174.96 v1(1683.92,1174.96)
  Top Layer w8: R3.2 1099.02,911.02 1099.02,925.52 D2.1 1135.31,932 1146,921.31 1146,904 1158,892 1242,892 v1(1270,920)
  Layer 2 w8: v1(1270,920) 1249.14,940.86 1249.14,961.14 1264,976 1352,976 1410,1034 1496,1034 1512,1050 1512,1126 1561.29,1175.29 1683.59,1175.29 v1(1683.92,1174.96)
UL: D5.1 R5.2 U1.21 | length 795.7
  Top Layer w6: U1.21 1558.33,1109.23 1563.93,1103.64 v1(1563.93,1100.47)
  Top Layer w8: R5.2 1193.02,673.02 1193.02,687.52 D5.1 v1(1230,694)
  Layer 2 w8: v1(1230,694) 1332,694 1394,756 1394,946 1440,992 1554,992 1564.31,1002.31 1564.31,1100.09 v1(1563.93,1100.47)
UVDC: C6.2 R6.2 R10.1 U1.14 | length 1280.2
  Top Layer w6: R6.2 v1(854,706) ; v1(1380,1100.28) 1389.72,1110 1442,1110 1448.1,1116.1 U1.14
  Layer 1 w6: v1(854,706) 918,642 1358,642 1380,664 v1(1380,1100.28)
  Bottom Layer w6: v1(1380,1100.28) 1464.28,1100.28 C6.2 R10.1
V3P3: C8.2 U1.4 | length 141.1
  Top Layer w6: C8.2 1296,1354 1344.63,1305.37 U1.4
V5V: C11.2 C14.2 R20.2 R24.1 U1.15 U2.3 | length 335
  Top Layer w8: U1.15 1463.85,1112.74 1447.1,1096 1412,1096 C14.2 1385.38,1058.62 1385.38,1054.62 R20.2 R24.1 1416.54,992 1422.54,986 C11.2 1461.38,980.62 1461.38,969.61 1485.59,945.39 1488.75,945.39 1493.2,940.94 U2.3@1493.2,932.86
V_OUT: H4.2 Q3.1 Q4.3 R15.1 R17.1 | length 793.3
  Top Layer w6: v1(756,740) R17.1 ; v1(756,1404) R15.1
  Layer 1 w6: v1(756,1404) 776,1404 786,1394 786,1194.59 810,1170.59 v1(810,1064)
  Layer 2 w6: v1(756,740) 778,740 788,750 788,1042 v1(810,1064)
VB: C9.2 D8.1 U1.29 | length 124.9
  Top Layer w6: U1.29 1676.21,1242.38 1680.7,1246.87 1696.87,1246.87 1720,1270 D8.1@1754.5,1270
VCC18: C2.1 U1.41 | length 178.1
  Top Layer w6: v1(1536,1450.14) 1536,1425.8 1542.59,1419.21 U1.41
  Bottom Layer w6: v1(1536,1450.14) 1536,1368 C2.1
VCCIO: C1.1 C10.1 C23.2 H3.1 R1.1 R2.1 T1.1 U1.44 U2.5 | length 2624.4
  Top Layer w6: U1.44 1495.67,1388.37 1495.67,1449.82 v1(1496,1450.14)
  Top Layer w8: U2.5 1462.76,816 C10.1 1422,786 1427.66,780.34 1463.66,780.34 v1(1486,758)
  Top Layer w10: v1(910,1460) 911,1459 911,1355 910,1354 910,1237.08 H3.1
  Layer 1 w10: v1(910,1460) 946,1496 1288,1496 v1(1310,1474) 1312.09,1474 1328.09,1458 1412,1458 1430,1476 1470.14,1476 v1(1496,1450.14)
  Layer 2 w8: v1(1486,758) 1746,758 1862,874 1862,1376 1739,1499 1521,1499 1496,1474 v1(1496,1450.14)
  Bottom Layer w6: R1.1 R2.1 ; R2.1@1452,1343 1483,1343 C1.1 1486,1392.91 1496,1402.91 v1(1496,1450.14)
VH: D7.1 R14.2 U1.28 | length 797.2
  Top Layer w6: U1.28@1641.39,1227.01 1641.58,1226.82 1688.74,1226.82 v1(1688.93,1227.01)
  Top Layer w8: R14.2 1082,1171.53 1086.69,1176.22 1099.71,1176.22 D7.1 1111.54,1175.96 1124.04,1175.96 1162,1138 1243.14,1138 1264.14,1159 v1(1264.14,1160)
  Layer 2 w8: v1(1264.14,1160) 1243.31,1180.83 1243.31,1204.55 1255.53,1216.77 1256.77,1216.77 1267.01,1227.01 v1@1688.39,1227.01
VHM: C18.2 R27.1 U1.19 | length 118.5
  Top Layer w8: R27.1@1526,1026 1526.42,1026.42 C18.2@1526.42,1062 ; C18.2 1526.84,1062.84 U1.19
VIN: 1.3 C17.1 C19.2 C22.1 C24.2 C26.1 C27.1 C28.1 C29.1 D18.1 P1.1 Q1.3 Q3.3 Q5.3 R7.1 R8.1 R27.2 | length 90.2
  Top Layer w10: R27.2 1567.14,1022.86 v1(1619.74,1022.86)
  Bottom Layer w10: R7.1 R8.1
  other v1: 1756,1080 1784,1080
VL: D10.1 R16.2 U1.22 | length 623.6
  Top Layer w6: U1.22 1575.02,1143.02 1575.02,1121.19 1587.85,1108.36 1587.85,1097.31 v1(1590.09,1095.07)
  Top Layer w8: R16.2 1235.02,929.02 1235.02,943.52 D10.1 v1(1270,950)
  Layer 2 w8: v1(1270,950) 1360,950 1422,1012 1508,1012 1532,1036 1532,1114 1542,1124 1604.46,1124 1609.14,1119.31 1609.14,1112.69 1591.52,1095.07 v1(1590.09,1095.07)
VP: C25.2 D3.2 D8.2 D13.2 R35.1 U1.18 | length 847.6
  Top Layer w8: U1.18 1511.09,1097.29 1496,1082.2 R35.1 C25.2 1501.38,1020.62 1501.38,1017.4 1516.79,1002 1689.1,1002 1701.1,1014 1856,1014 1864,1022 1864,1120 1817.5,1166.5 1817.5,1200 1817.5,1270 D13.2@1817.5,1338
VVDC: C13.2 R17.2 R21.1 U1.13 | length 1175.7
  Top Layer w6: R17.2 v1(854,740) ; v1(1379.41,1126.97) 1382.39,1126.97 1395.32,1139.9 1395.98,1139.9 1400.04,1143.96 U1.13
  Layer 1 w6: v1(854,740) 938,656 1328,656 1354,682 1354,1120 1360.97,1126.97 v1(1379.41,1126.97)
  Bottom Layer w6: v1(1379.41,1126.97) 1380.9,1125.49 1452.51,1125.49 R21.1
W_OUT: H4.3 Q5.1 Q6.3 R26.1 R29.1 | length 787.5
  Top Layer w6: v1(756,774) R29.1 ; v1(756,1438) R26.1
  Layer 1 w6: v1(756,1438) 788,1438 810,1416 v1(810,1201.8)
  Layer 2 w6: v1(756,774) 756,1147.8 v1(810,1201.8)
WB: C15.2 D13.1 U1.32 | length 140.2
  Top Layer w6: U1.32 1675.88,1289.62 1689,1302.74 1689,1312.77 1707.47,1331.23 1713.15,1331.23 C15.2@1719.96,1338.04 ; C15.2@1720,1338 1752.5,1338 D13.1
WH: D12.1 R25.2 U1.31 | length 995.9
  Top Layer w6: U1.31 1677.11,1273.88 1701,1297.77 1701,1307.8 1710.2,1317 1730.8,1317 1736.89,1310.91 1754.23,1310.91 v1(1754.65,1311.33)
  Top Layer w8: R25.2 1133.02,1383.02 1133.02,1397.52 D12.1 1138.75,1404.75 1138.75,1445.25 v1(1138,1446)
  Bottom Layer w6: v1(1138,1446) 1262,1446 1296,1412 1320,1412 1342,1390 1342,1314 1372.14,1283.86 1455.86,1283.86 1467,1295 1467,1316.8 1477.2,1327 1633.2,1327 1637.2,1323 1742.28,1323 1753.95,1311.33 v1(1754.65,1311.33)
WL: D15.1 R28.2 U1.23 | length 731.2
  Top Layer w6: U1.23 1590.77,1143.02 1590.77,1122.42 1603.18,1110 v1(1630,1110)
  Top Layer w8: R28.2 1235.02,1175.02 1235.02,1189.52 D15.1@1241.5,1196 ; D15.1 D15.1 1264.13,1193.96 v1(1264.17,1193.91)
  Layer 2 w8: v1@1264.17,1195.91 1264.26,1195.82 1694.18,1195.82 1716,1174 1716,1138 1688,1110 v1(1630,1110)
WVDC: C21.2 R29.2 R32.1 U1.12 | length 1151.4
  Top Layer w6: R29.2 v1(854,774) ; v1(1380.02,1152.68) 1380.68,1152.68 1396.92,1168.92 U1.12
  Layer 1 w6: v1(854,774) 958,670 1294,670 1326,702 1326,1123.65 1355.03,1152.68 v1(1380.02,1152.68)
  Bottom Layer w6: v1(1380.02,1152.68) C21.2
pads on no net: SW1. SW1.3 SW2.

## Polygon pours and split planes (outlines as drawn)
GND on Bottom Layer "GND_L04_P008" (solid, remove dead copper, pour order 8): 738,672 cw(c738,626) 784,626 1834,626 ccw(c1834,636) 1844,636 cw(c1868,636) 1868,660 cw(c1868,636) 1892,636 ccw(c1902,636) 1902,626 2068,626 ccw(c2068,634) 2076,634 2076,924 ccw(c2060,924) 2060,940 1914,940 cw(c1914,954) 1900,954 1900,1182 cw(c1912,1182) 1912,1194 2060,1194 ccw(c2060,1210) 2076,1210 2076,1498 ccw(c2064,1498) 2064,1510 1898,1510 ccw(c1898,1500) 1888,1500 cw(c1864,1500) 1864,1476 cw(c1864,1500) 1840,1500 ccw(c1830,1500) 1830,1510 780,1510 cw(c734,1510) 734,1464 ccw(c734,1460) 730,1460 730,680 ccw(c738,680)
NetQ2_1 on Bottom Layer "NETQ2_1_L04_P007" (solid, remove dead copper, pour order 7): 1080,736.45 1084,732.45 1150,732.45 1152,734.45 1152,804.45 1148,808.45 1086,808.45 1080,802.45
NetQ4_1 on Bottom Layer "NETQ4_1_L04_P006" (solid, remove dead copper, pour order 6): 1080,983.2 1084,979.2 1150,979.2 1152,981.2 1152,1051.2 1148,1055.2 1086,1055.2 1080,1049.2
NetQ6_1 on Bottom Layer "NETQ6_1_L04_P005" (solid, remove dead copper, pour order 5): 1080,1230 1084,1226 1150,1226 1152,1228 1152,1298 1148,1302 1086,1302 1080,1296
VIN on Bottom Layer "VIN_L04_P004" (solid, remove dead copper, pour order 4): 2028,1498 2062,1464 2062,1226 2044,1208 1904,1208 1900,1204 1900,934 1842,876 1379.29,876 1348,844.71 1348,834 1330,816 1328,818 1028,818 1012,834 1012,926 1020,934 1150,934 1160,944 1160,1048 1144,1064 1026,1064 1016,1074 1016,1170 1024,1178 1152,1178 1160,1186 1160,1302 1148,1314 1026,1314 1016,1324 1016,1420 1024,1428 1266,1428 1292,1402 1332,1402 1342,1392 1342,1210 1402,1150 1688.93,1150 1744,1240.71 1744,1398 1766,1420 1880,1420 1908,1448 1908,1470 1936,1498
W_OUT on Bottom Layer "W_OUT_L04_P003" (solid, remove dead copper, pour order 3): 746,1264 770,1288 842,1288 930,1376 950,1396 998,1396 1004,1390 1004,1308 1012,1300 1064,1300 1070,1294 1070,1204 1062,1196 954,1196 896,1138 760,1138 746,1152
V_OUT on Bottom Layer "V_OUT_L04_P001" (solid, remove dead copper, pour order 1): 742,1112 760,1130 900,1130 920,1150 1000,1150 1006,1144 1006,1064 1016,1054 1064,1054 1072,1046 1072,956 1062,946 932,946 878,1000 760,1000 742,1018
U_OUT on Bottom Layer "U_OUT_L04_P000" (solid, remove dead copper, pour order 0): 768,990 744,966 744,858 760,842 808,842 940,710 950,700 1060,700 1070,710 1070,800 1060,810 1014,810 1004,820 1004,902 960,902 872,990
GND on Top Layer "GND_L01_P009" (solid, remove dead copper, pour order 9): 738,672 cw(c738,626) 784,626 1834,626 ccw(c1834,636) 1844,636 cw(c1868,636) 1868,660 cw(c1868,636) 1892,636 ccw(c1902,636) 1902,626 2068,626 ccw(c2068,634) 2076,634 2076,924 ccw(c2060,924) 2060,940 1914,940 cw(c1914,954) 1900,954 1900,1182 cw(c1912,1182) 1912,1194 2060,1194 ccw(c2060,1210) 2076,1210 2076,1498 ccw(c2064,1498) 2064,1510 1898,1510 ccw(c1898,1500) 1888,1500 cw(c1864,1500) 1864,1476 cw(c1864,1500) 1840,1500 ccw(c1830,1500) 1830,1510 780,1510 cw(c734,1510) 734,1464 ccw(c734,1460) 730,1460 730,680 ccw(c738,680)
GND on Layer 1 "GND_L02_P010" (solid, remove dead copper, pour order 10): 738,672 cw(c738,626) 784,626 1834,626 ccw(c1834,636) 1844,636 cw(c1868,636) 1868,660 cw(c1868,636) 1892,636 ccw(c1902,636) 1902,626 2068,626 ccw(c2068,634) 2076,634 2076,924 ccw(c2060,924) 2060,940 1914,940 cw(c1914,954) 1900,954 1900,1182 cw(c1912,1182) 1912,1194 2060,1194 ccw(c2060,1210) 2076,1210 2076,1498 ccw(c2064,1498) 2064,1510 1898,1510 ccw(c1898,1500) 1888,1500 cw(c1864,1500) 1864,1476 cw(c1864,1500) 1840,1500 ccw(c1830,1500) 1830,1510 780,1510 cw(c734,1510) 734,1464 ccw(c734,1460) 730,1460 730,680 ccw(c738,680)
GND on Layer 2 "GND_L03_P011" (solid, remove dead copper, pour order 11): 738,672 cw(c738,626) 784,626 1834,626 ccw(c1834,636) 1844,636 cw(c1868,636) 1868,660 cw(c1868,636) 1892,636 ccw(c1902,636) 1902,626 2068,626 ccw(c2068,634) 2076,634 2076,924 ccw(c2060,924) 2060,940 1914,940 cw(c1914,954) 1900,954 1900,1182 cw(c1912,1182) 1912,1194 2060,1194 ccw(c2060,1210) 2076,1210 2076,1498 ccw(c2064,1498) 2064,1510 1898,1510 ccw(c1898,1500) 1888,1500 cw(c1864,1500) 1864,1476 cw(c1864,1500) 1840,1500 ccw(c1830,1500) 1830,1510 780,1510 cw(c734,1510) 734,1464 ccw(c734,1460) 730,1460 730,680 ccw(c738,680)

## Other copper
Top Layer:
  rectangle net NetQ2_1: 1084,730 1148,806
  rectangle net NetQ4_1: 1084,978 1148,1054
  rectangle net NetQ6_1: 1084,1224 1148,1300
  pour cut-out: 1650,968 1756,968 1756,824 1650,824

## Silkscreen, mask and mechanical layers (free items; w line width, h text height)
Top Overlay:
  text "Mini_Driver" at 1888,893.1 h40
Mechanical 1:
  lines w10: 730,680 ccw(c738,680) 738,672 cw(c738,626) 784,626 854,626 1834,626 ccw(c1834,636) 1844,636 cw(c1868,636) 1868,660 cw(c1868,636) 1892,636 ccw(c1902,636) 1902,626 2068,626 ccw(c2068,634) 2076,634 2076,798 2076,924 ccw(c2060,924) 2060,940 1914,940 cw(c1914,954) 1900,954 1900,1182 cw(c1912,1182) 1912,1194 2060,1194 ccw(c2060,1210) 2076,1210 2076,1270 2076,1498 ccw(c2064,1498) 2064,1510 1898,1510 ccw(c1898,1500) 1888,1500 cw(c1864,1500) 1864,1476 cw(c1864,1500) 1840,1500 ccw(c1830,1500) 1830,1510 850,1510 780,1510 cw(c734,1510) 734,1464 ccw(c734,1460) 730,1460 730,996 730,680

## Dimensions
730,680 to 2076,634 on Mechanical 1
780,1510 to 784,626 on Mechanical 1